# Altium PCB PCB.PcbDoc
Units mm, origin at the board's own origin, x right, y up, seen from the top; angles counter-clockwise.
Board outline 30 x 50 mm, 2 copper layers (Top Layer, Bottom Layer); 30 components, 21 nets, 99 pads, 31 vias.
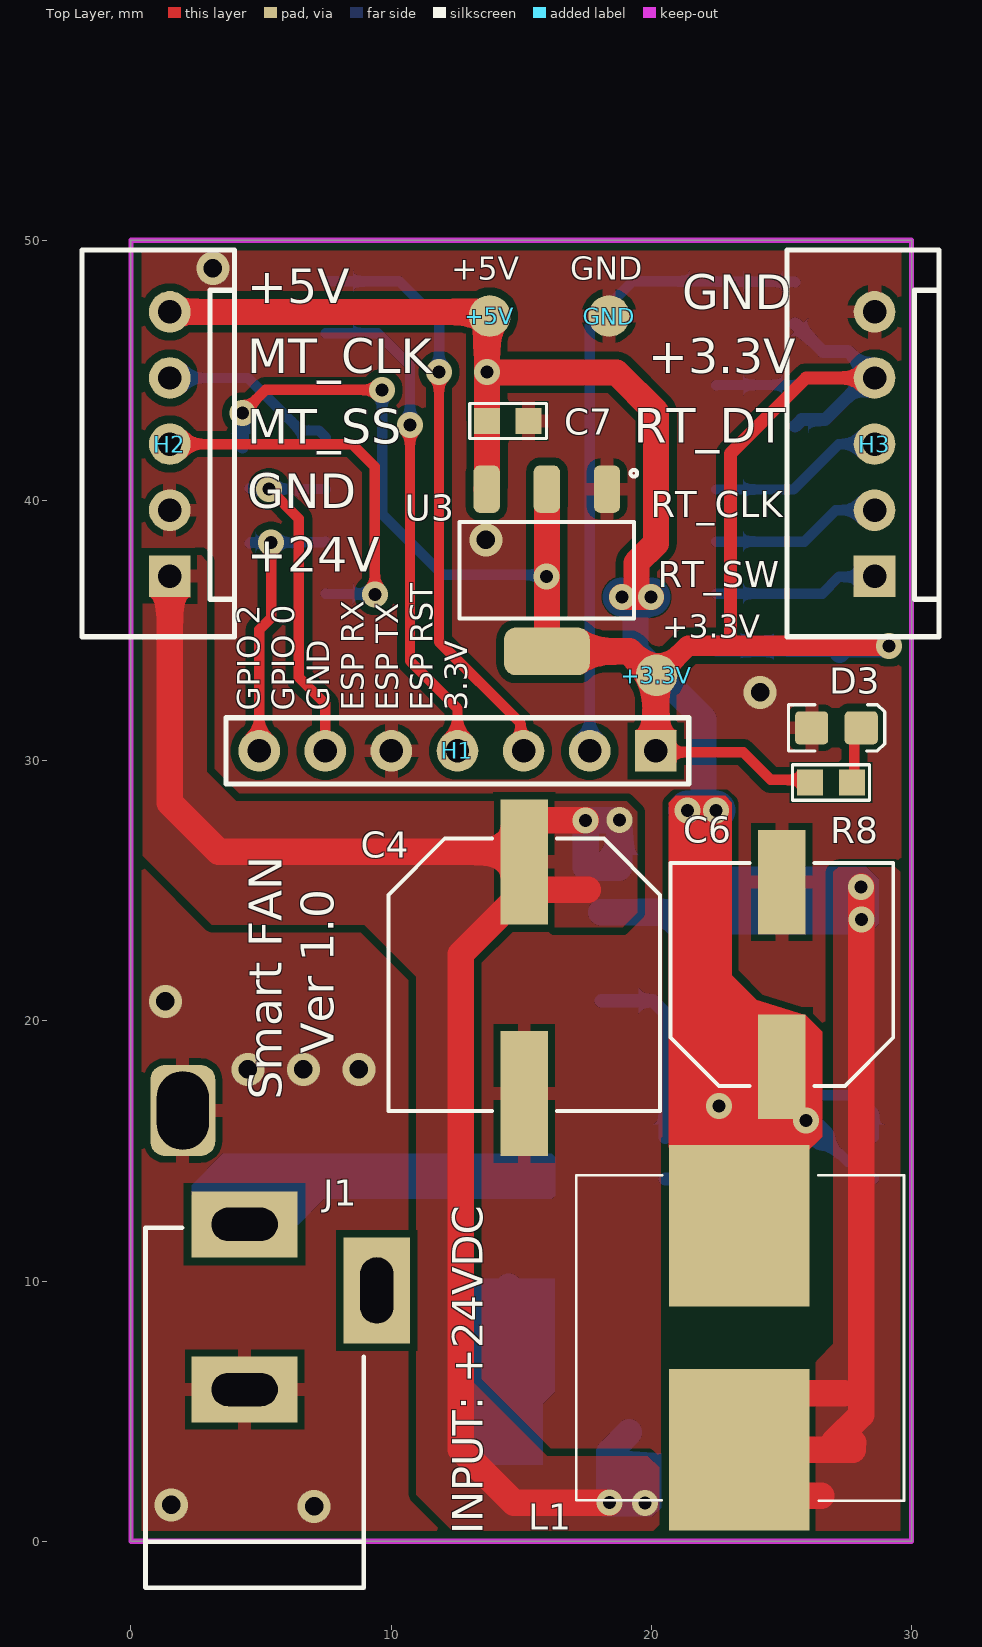
[diagram p0: Top Layer view]
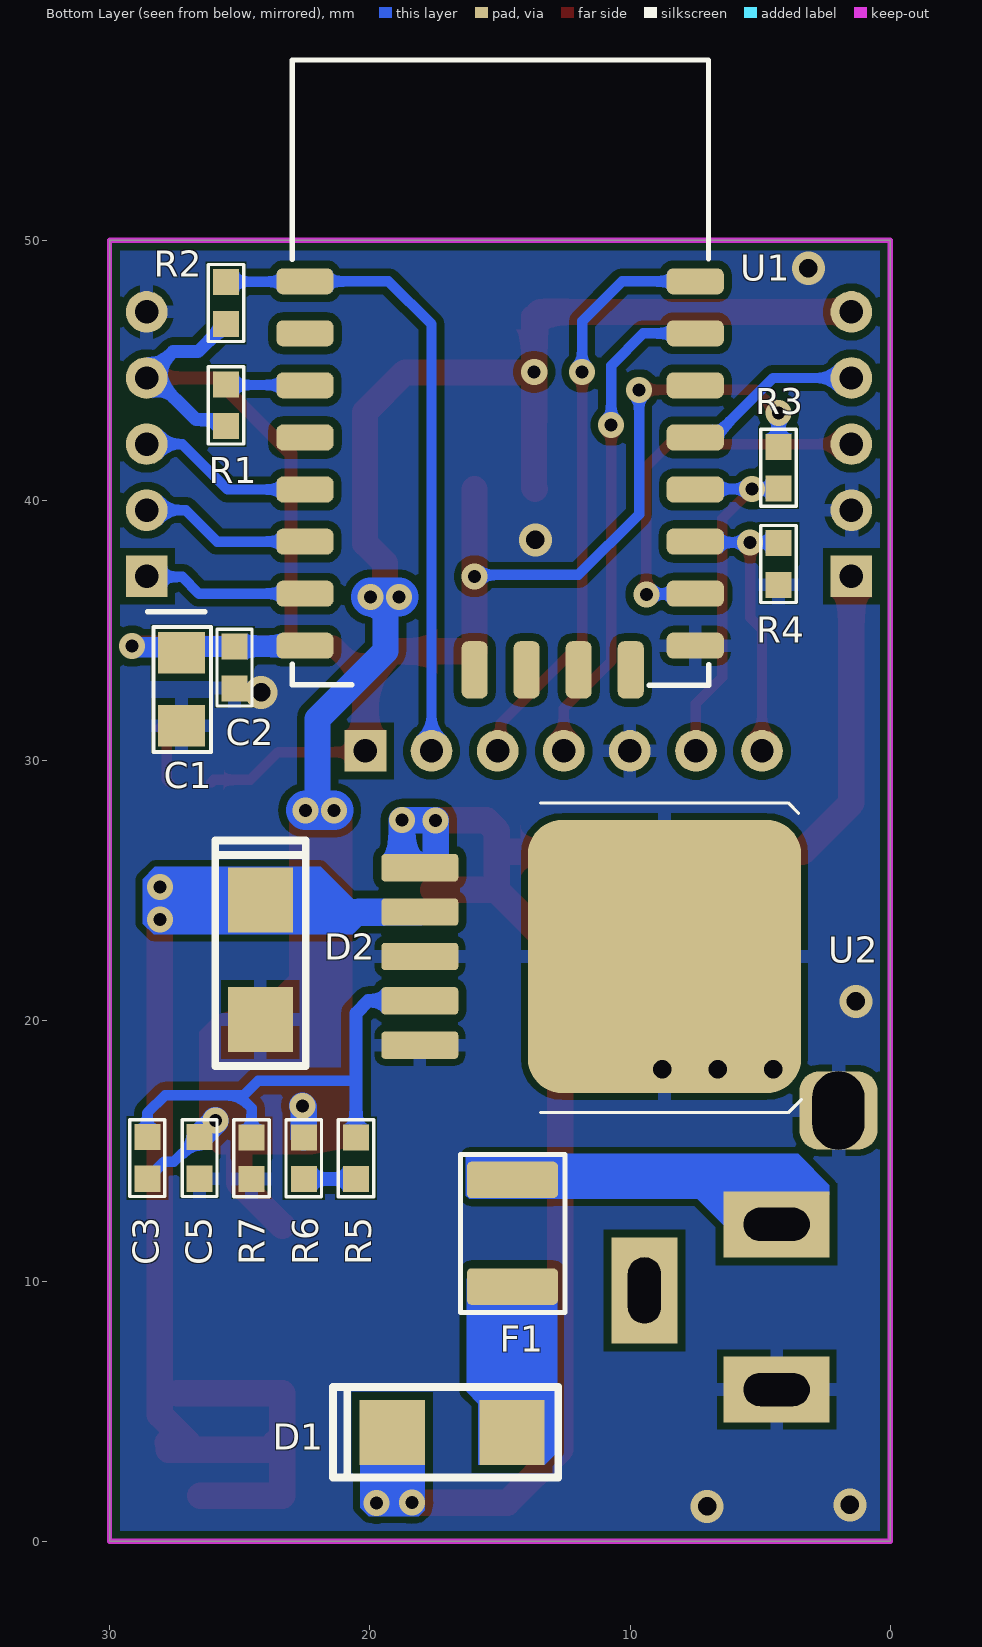
[diagram p1: Bottom Layer view, seen from below]
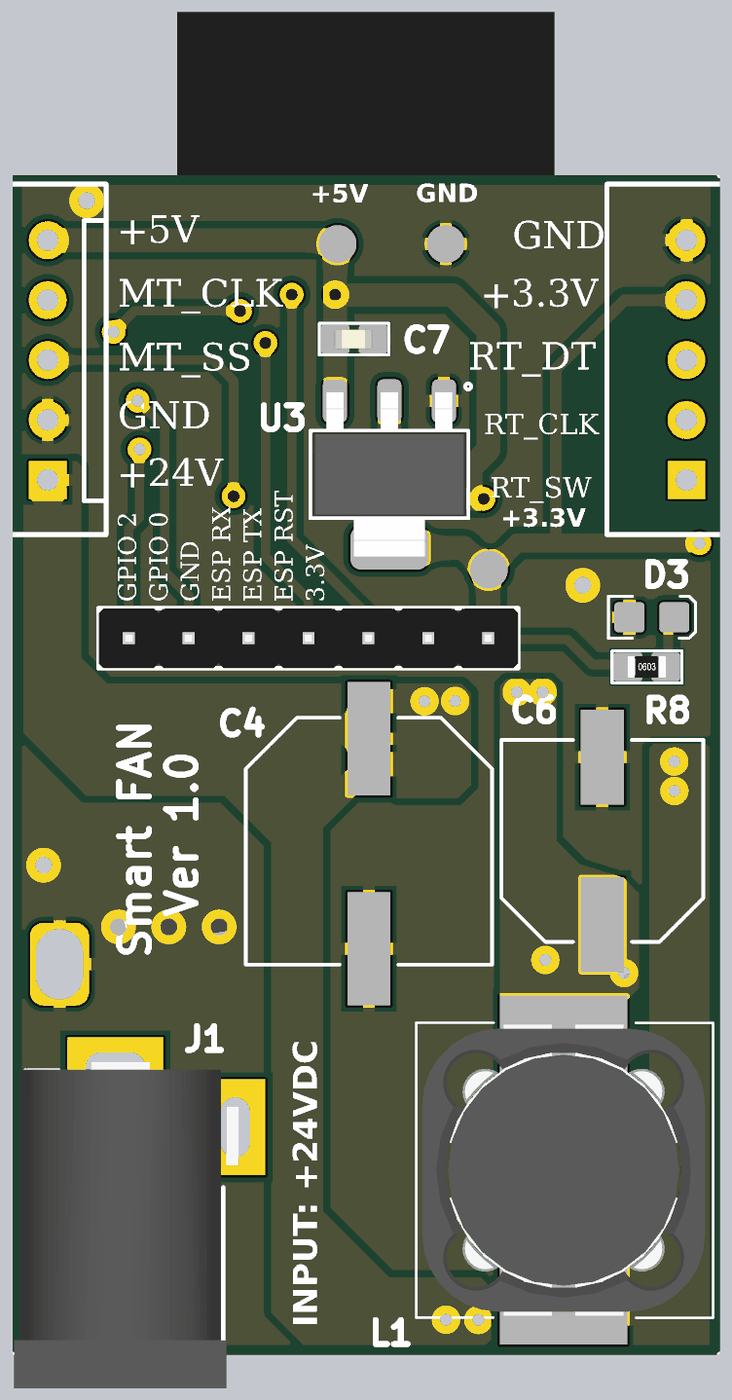
[diagram p2: 3D render of the assembled board from above, using the file's embedded part models]
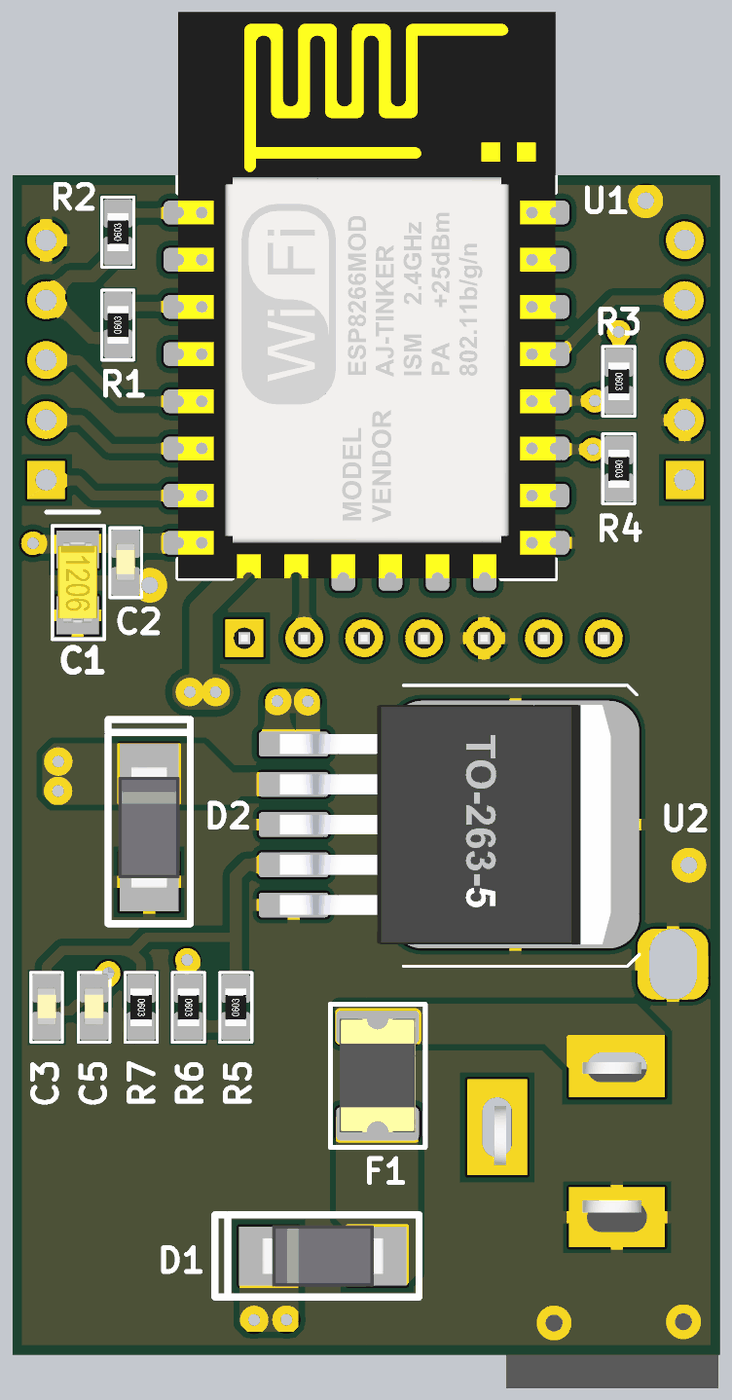
[diagram p3: 3D render of the assembled board from below, using the file's embedded part models]

## Layer stack, top to bottom
Top Solder: solder mask 0.0102, Solder Resist, Dk 3.5
Top Layer: signal copper 0.0356
Dielectric 1: dielectric 0.32, FR-4, Dk 4.8
Bottom Layer: signal copper 0.0356
Bottom Solder: solder mask 0.0102, Solder Resist, Dk 3.5

## Board outline
0,0 0,50 30,50 30,0

## Design rules (kind name [scope] priority, off if disabled: settings)
Clearance [All] p1: gap=0.254 ignorepadtopadclearanceinfootprint=FALSE except(0: Arc-Hole Track-Hole SMDPad-Hole THPad-Hole Via-Hole Fill-Hole Poly-Hole Region-Hole Text-Hole; 0.1: Text-Text; 0.2: Arc-Text Track-Text SMDPad-Text THPad-Text Via-Text Fill-Text Poly-Text Region-Text; 0.3: Arc-Poly Track-Poly SMDPad-Poly THPad-Poly Via-Poly Poly-Poly)
PolygonConnect PolygonConnect_PAD [IsVia] p1: connectstyle=Direct reliefconductorwidth=0.254 reliefentries=4 polygonreliefangle="90 Angle" airgapwidth=0.254
PolygonConnect [All] p2: connectstyle=Relief reliefconductorwidth=0.508 reliefentries=4 polygonreliefangle="90 Angle" airgapwidth=0.254
RoutingVias [All] p1: holewidth=0.5 width=1 viastyle="Through Hole" minholewidth=0.5 minwidth=1 maxholewidth=0.5 maxwidth=1
SilkToSilkClearance [All] p1: silktosilkclearance=0.15
SilkToSolderMaskClearance [IsPad] p1: minsilkscreentomaskgap=0.1 clearancetoexposedcopper=TRUE
SolderMaskExpansion SolderMaskExpansion_VIA [IsVia] p1: expansion=-44 istentingtop=FALSE
SolderMaskExpansion [All] p2: expansion=0.102 istentingtop=FALSE
Width [All] p1: maxlimit=1.778 minlimit=0.254 preferedwidth=1.016
28 further rules are at their usual default settings.

## Components (designator, comment, footprint, x,y, rotation, side; value= is the part's Value field where it differs from the comment)
+3.3V "Test Point" "TEST POINT" 20.2,33.283 r90 top
+5V "Test Point" "TEST POINT" 13.786,47.085 r180 top
C1 "10uF16V" "CAP TANTALUM TAJA 1206" 27.237,32.744 r270 bottom
C2 "0.1uF" "CAP 0603" 25.2,33.579 r270 bottom
C3 "10pF" "CAP 0603" 28.55,14.732 r270 bottom
C4 "220uF" "CAP ALUMINUM UUD 10X10MM SMD" 15.116,21.661 r270 top
C5 "0.1uF" "CAP 0603" 26.542,14.732 r270 bottom
C6 "100uF" "CAP ALUMINUM UUD 8X10MM SMD" 25.014,21.782 r90 top
C7 "0.1uF" "CAP 0603" 14.485,43.05 r0 top
D1 "SS34" DO-214AC 16.839,4.185 r0 bottom
D2 "SS34" DO-214AC 24.208,22.35 r90 bottom
D3 "LED" "LED 0805-A" 27.111,31.26 r0 top value="LED 3 - 5 ly 2 Colour"
F1 "2.5A 16V" "FUSE 1812" 14.519,11.839 r270 bottom
GND "Test Point" "TEST POINT" 18.374,47.085 r90 top
H1 "Header 2.54mm 1x7PIN" "HEADER 2.54MM 1X7PIN 180" 12.548,30.374 r180 top locked
H2 "XH2.54-5P_A" XH2.54-5P_A 1.494,42.164 r90 top
H3 "XH2.54-5P_A" XH2.54-5P_A 28.575,42.164 r90 top
J1 "Jack DC 5.5x2.1mm" "JACK DC 5.5X2.1MM" 4.952,5.984 r90 top
L1 "68uH" "INDUCTOR CDRH127" 23.368,7.823 r90 top locked
R1 "10k" "RES 0603" 25.527,43.65 r90 bottom
R2 "10k" "RES 0603" 25.527,47.587 r90 bottom
R3 "10k" "RES 0603" 4.293,41.259 r270 bottom
R4 "10k" "RES 0603" 4.293,37.554 r270 bottom
R5 "1.5k" "RES 0603" 20.53,14.722 r90 bottom
R6 "1.5k" "RES 0603" 22.538,14.722 r270 bottom
R7 "1k" "RES 0603" 24.545,14.722 r270 bottom
R8 "120Ω" "RES 0603" 26.9,29.158 r0 top
U1 "ESP8266MOD ESP-12E" "MODULE ESP8266MOD ESP-12E" 14.993,40.953 r180 bottom locked
U2 "LM2596S-ADJ" "TO-263 5PIN" 13.377,22.475 r180 bottom
U3 "LM1117-3.3V" "SOT-223 4PIN" 15.982,37.315 r180 top locked

## Footprints (in the part's own frame and the unit in brackets; to place one, negate y for a bottom-side part, rotate by r counter-clockwise, add the part's x,y. Pads: shape width x height; smd on the part's side, far side on the other; paste and mask are expansions set on the pad)
"CAP 0603" [mm] "Capacitor Ceramic 0603"
  rect 1x1 smd paste+0.102 mask+0.102: 1(0.8,0) 2(-0.8,0)
  silkscreen extent -1.47,-0.67 1.48,0.67, body extent -0.83,-0.41 0.77,0.41, height 0.57
"CAP ALUMINUM UUD 8X10MM SMD" [mil] "Cap Aluminum, UUD 8x10mm, Nichicon SMD"
  rect 158x72 smd: 1(-139.76,0) 2(139.76,0)
  silkscreen extent -168,-168 169,168, body extent -175,-163 175,164, height 394
"CAP ALUMINUM UUD 10X10MM SMD" [mm] "Cap Aluminum, UUD 10x10mm, Nichicon SMD"
  rect 4.8x1.829 smd: 1(-4.45,0) 2(4.45,0)
  silkscreen extent -5.34,-5.22 5.13,5.22, body extent -5.5,-5.14 5.4,5.16, height 10
"CAP TANTALUM TAJA 1206" [mm] "Capacitor Tantalum TAJA 1206, SMD"
  rect 1.6x1.8 smd: 1(-1.4,0) 2(1.4,0)
  silkscreen extent -2.39,-1.07 2.41,1.13, body extent -1.7,-0.84 1.7,0.84, height 1.71
DO-214AC [mm] "JEDEC DO214 variation AC. SMA"
  round 0.508 on Mech15: 0(0,0)
  rect 2.5x2.5 smd: 1(-2.3,0) 2(2.3,0)
  silkscreen extent -4.08,-1.74 4.58,1.74, body extent -2.6,-1.3 2.6,1.3, height 2.42
"FUSE 1812" [mm] "Fuse 1812, SMD"
  round 0.508 on Mech15: 0(0,0)
  rrect25% 1.4x3.5 smd: 1(-2.05,0) 2(2.05,0)
  silkscreen extent -3.02,-2 3.05,2.02, body extent -2.41,-1.61 2.41,1.61, height 1.32
"HEADER 2.54MM 1X7PIN 180" [mm] "Header male, 2.54mm, 1x7PIN, 180 Degrees DIP"
  rect 1.6x1.6 hole 0.9: 1(-7.62,0)
  round 1.6 hole 0.9: 2(-5.08,0) 3(-2.54,0) 4(0,0) 5(2.54,0) 6(5.08,0) 7(7.62,0)
  silkscreen extent -8.89,-1.27 8.89,1.27, body extent -8.89,-1.27 8.89,1.27, height 7.98
"INDUCTOR CDRH127" [mm] "Inductor CDRH127, 12X12X8mm, SMD"
  rect 6.2x5.4 smd: 1(-4.3,0) 2(4.3,0)
  silkscreen extent -6.26,-6.34 6.25,6.25, body extent -6.17,-6 6.17,6, height 7.44
"JACK DC 5.5X2.1MM" [mil]
  rect 100x160 hole 50 slot 100 at 90 deg: 1(244,23) 2(-6,23)
  rect 160x100 hole 50 slot 100 at 0 deg: 3(144,-177)
  silkscreen extent -306,-157 239,173, body extent -291,-182 253,192, height 434
"LED 0805-A" [mil] "LED 0805 Anode"
  round 20 on Mech15: 0(0,0)
  rrect25% 50x50 smd: 1(37.5,0) 2(-37.5,0)
  Top Layer pour cut-out: -15,30 15,30 15,-30 -15,-30
  silkscreen extent -72,-35 73,35, body extent -39,-25 39,25, height 31
"MODULE ESP8266MOD ESP-12E" [mm] "SDIO 2.0-SPI-UART, 802.11b/g/n, 4MB Flash, 3-3.6V 80mA"
  rrect50% 2.2x1 smd: 1(-7.5,7.465) 2(-7.5,5.465) 3(-7.5,3.465) 4(-7.5,1.465) 5(-7.5,-0.535) 6(-7.5,-2.535) 7(-7.5,-4.535) 8(-7.5,-6.535) 15(7.5,-6.535) 16(7.5,-4.535) 17(7.5,-2.535) 18(7.5,-0.535) 19(7.5,1.465) 20(7.5,3.465) 21(7.5,5.465) 22(7.5,7.465)
  rrect50% 1x2.2 smd: 11(-0.98,-7.465) 12(1.02,-7.465) 13(3.02,-7.465) 14(5.02,-7.465)
  silkscreen extent -7.99,-8.06 8.02,15.96, body extent -7.99,-8.04 8.02,15.96, height 2.65
"RES 0603" [mm] "Resistor 0603"
  rect 1x1 smd paste+0.102 mask+0.102: 1(0.8,0) 2(-0.8,0)
  silkscreen extent -1.48,-0.68 1.48,0.68, body extent -0.8,-0.45 0.8,0.45, height 0.5
"SOT-223 4PIN" [mil] "Package Type: SOT-223, Package Drawing: DCY"
  rrect50% 40x72 smd: 1(-91,-122.75) 2(0,-122.75) 3(91,-122.75)
  rrect50% 130x72 smd: 4(0,122.75)
  silkscreen extent -136,-152 132,73, body extent -128,-137 128,137, height 66
"TEST POINT" [mm] "Test Point 1.6mm, SMD"
  round 1.6 smd: 1(0,0)
"TO-263 5PIN" [mm] "D-PAK/TO-263 5PIN"
  round 0.5 on Mech15: 0(1.45,0)
  rrect25% 2.95x1.05 smd: 1(-4.7,3.41) 2(-4.7,1.705) 3(-4.7,0) 4(-4.7,-1.705) 5(-4.7,-3.41)
  rrect25% 10.5x10.5 smd: 3(4.7,0)
  silkscreen extent -0.05,-6 9.95,5.9, body extent -5.28,-5.08 8.74,5.08, height 4.56
XH2.54-5P_A [mm] "Bus, 5PIN 2.54mm, 180 Degrees DIP"
  rect 1.6x1.6 hole 0.9: 1(-5.08,0)
  round 1.6 hole 0.9: 2(-2.54,0) 3(0,0) 4(2.54,0) 5(5.08,0)
  silkscreen extent -7.4,-2.48 7.46,3.37, body extent -7.45,-2.35 7.45,3.4, height 7

## Part data
+3.3V +5V GND: "Test Point 1.6mm, SMD"
C1: library part "Cap Tantalum 1206 10uF16V", "Capacitor Tantalum TAJA106K016RNJ, 10uF 16V 10%, 1206 SMD"
C2 C5 C7: library part "Cap 0603 - 50V - 0.1uF", "[LK00183] / Tụ điện Ceramic 0603 0.1uF, 50V, 10%"
C3: library part "Cap 0603 - 50V - 10pF", "[LK00370] / Tụ điện Ceramic 0603 10pF, 50V, 5%"
C4: library part "Cap Aluminum 50V - 220uF", "[LK00306] / Tụ Aluminum 220uF 50V 20%, 10x10.5mm, SMD (UUD1H221MNL1GS Nichicon)"
C6: library part "Cap Aluminum 50V - 100uF", "[LK00305] / Tụ Aluminum 100uF 50V 20%, 8x10.5mm, SMD (UUD1V101MNL1GS Nichicon)"
D1: library part "Diode Schottky SS34", "[LK00095] / Diode Schottky SS34, Small Signal Schottky Diode, Vrrm=40V, If=3A, SOD-80 SMD"
D2: library part "Diode Schottky SS34", "[LK00087] / Diode Schottky SS34, Small Signal Schottky Diode, Vrrm=40V, If=3A, SOD-80 SMD"
D3: library part "LED 0805 SMD", "LED 0805 SMD Green"
F1: library part "Fuse 1812 2.5A 16V", "[LK00218] / Fuse PTC MF-MSMF250/16X, 2.5A 16V, 1812 SMD"
H1: library part "Header 2.54mm 1x7PIN 180", "Header male 2.54mm, 1x7PIN, 180 Degrees DIP"
H2 H3: "Bus, XH2.54-5PIN 2.54mm, 180 Degrees DIP"
L1: library part "Inductor CDRH127 68uH", "[LK00261] / Inductor CDRH127 68uH, 12X12X8mm, SMD"
R1 R2 R3 R4: library part "Res 0603 - 1% - 10k", "[LK00053] / Resistor 0603, 10k, 1%, 1/10W"
R5 R6: library part "Res 0603 - 1% - 1.5k", "[LK00050] / Resistor 0603, 1.5k, 1%, 1/10W"
R7: library part "Res 0603 - 1% - 1k", "[LK00054] / Resistor 0603, 1k, 1%, 1/10W"
R8: library part "Res 0603 - 5% - 120Ω", "[LK00234] / Resistor 0603 120R, 5%, 1/10W"
U1: library part "Module ESP8266MOD ESP-12E", "Module ESP8266MOD ESP-12E, SDIO 2.0-SPI-UART, 802.11b/g/n, 4MB Flash, 3-3.6V 80mA"
U2: "[LK00299] / IC Power LM2596S-ADJ, In Vmax 40V, Buck ADJ 3A, 1.23-37V, TO263-5 SMD"
U3: library part "Power LM1117-3.3V", "IC LM1117-3.3V, 8mA, Vmax=20V, SOT-223"

## Free pads (board coordinates)
  rrect45% 2.5x3.5 / inner rrect50% 3x3 / far side rrect50% 3x3 hole 2 slot 3 at 90 deg paste+0 mask+0.1: 2(1.993,16.555)

## Via types
v1: diameter 1, hole 0.5, Top Layer to Bottom Layer, 22 vias
v2: diameter 1.27, hole 0.711, Top Layer to Bottom Layer, 9 vias

## Nets (pads, with @x,y where several pads share a name; then routed paths per layer and width w, separated by ;. In a path a pad name is that pad's centre, name@x,y a point inside that pad or via, vN(x,y) a via of type N, cw(c..) or ccw(c..) an arc to the next point about the centre after c; other vN are vias at no path point)
+3.3V_SYS: +3.3V.1 C1.1 C2.2 H1.1 H3.4 R1.2 R2.2 R3.2 R8.2 U1.8 U3.2 U3.4 | length 77.5
  Top Layer w0.4: v1(4.293,43.358) 5.182,44.247 v1(9.652,44.247) ; H1.1 20.218,30.324 23.524,30.324 23.571,30.277 24.587,29.261 25.997,29.261 R8.2
  Top Layer w0.5: 23.033,34.417 23.033,41.796 25.941,44.704 H3.4
  Top Layer w0.8: +3.3V.1@20.168,33.172 21.414,34.417 23.033,34.417 29.112,34.417 v1(29.131,34.398)
  Top Layer w1: U3.4 15.982,37.084 U3.2
  Top Layer w1.016: U3.4 19.143,34.197 20.168,33.172 H1.1
  Bottom Layer w0.4: v1(9.652,44.247) 9.652,39.472 11.989,37.135 15.926,37.135 v1(15.977,37.084)
  Bottom Layer w0.5: R3.2 v1(4.293,43.358) ; R1.2 25.777,43.1 26.673,43.1 28.277,44.704 H3.4 27.559,45.72 26.594,45.72 R2.2
  Bottom Layer w0.8: U1.8 22.513,34.398 25.253,34.398 25.273,34.378 25.281,34.386 C1.1@27.421,34.386 ; C1.1 27.452,34.36 29.093,34.36 v1(29.131,34.398)
+5V_SYS: +5V.1 C3.1 C5.2 C6.1 C7.2 H2.5 L1.2 R6.2 U3.3 | length 71.6
  Top Layer w0.8: H2.5 H2.5@1.6,47.244 ; U3.3@13.657,40.446 U3.3 ; C7.2@13.684,43.051 C7.2 ; v1@13.684,44.937 v1(13.682,44.939) 13.685,44.943 v1@13.685,44.977 ; +5V.1@13.685,46.984 +5V.1 ; v1(22.479,28.092) 22.479,21.807 24.447,19.838 24.5,19.838 25.014,19.324 C6.1
  Top Layer w1: H2.5@1.6,47.244 13.465,47.244 13.682,47.027 +5V.1@13.682,46.98 ; U3.3@13.657,40.446 13.685,40.475 C7.2 ; C7.2@13.682,43.078 v1(13.682,44.939) +5V.1@13.682,46.98 ; +5V.1@13.685,46.984 +5V.1@13.682,46.98 ; v1@13.74,44.922 18.651,44.922 20.177,43.396 20.177,38.349 19.424,37.597 19.424,36.289 ; v1(18.879,36.289) 19.424,36.289 ; v1(19.979,36.28) 19.97,36.289 19.424,36.289
  Top Layer w1.016: v1(22.593,16.732) 24.235,16.732 24.236,16.733 25.014,16.733 25.014,15.672 ; L1.2 25.014,13.769 25.014,15.672 ; C6.1@25.014,17.14 C6.1 ; v1(25.933,16.18) 25.425,15.672 25.014,15.672
  Bottom Layer w0.4: C5.2 27.188,14.886 27.23,14.886 27.538,14.578 27.904,14.578 C3.1
  Bottom Layer w1: v1(19.979,36.28) 19.393,35.694 19.393,34.219 22.009,31.602 22.009,28.562
  Bottom Layer w1.016: R6.2 22.538,16.677 v1(22.593,16.732) ; v1(25.933,16.18) 25.933,16.141 C5.2
  Bottom Layer w1.5: v1(18.879,36.289) 19.97,36.289 v1(19.979,36.28) ; v1(21.381,28.092) v1(22.479,28.092)
+24V_SYS: C4.1 D1.2 H2.1 U2.1 | length 68.6
  Top Layer w1.016: H2.1 1.494,28.376 3.379,26.492 C4.1@15.116,26.492 ; v1(17.472,27.7) 15.522,27.7 15.116,27.294 C4.1@15.116,26.492 ; 17.56,25.032 C4.1@15.116,25.032 ; v1(18.382,1.485) 14.72,1.485 12.675,3.531 12.675,22.565 15.116,25.006 C4.1@15.116,25.032 ; C4.1@15.116,25.032 C4.1@15.116,26.492
  Bottom Layer w1.016: v1(17.472,27.7) 17.472,25.902 17.489,25.885 U2.1 18.754,25.885 18.771,25.902 v1(18.771,27.711) v1@17.483,27.711 ; v1(18.382,1.485) 18.397,1.5 18.397,3.443 D1.2
  other v1: 19.75,1.475
ESP_GPIO_0: H1.6 R3.1 U1.18 | length 13.9
  Top Layer w0.4: v1(5.309,40.439) 6.452,39.296 6.452,33.198 7.468,32.181 H1.6
  Bottom Layer w0.4: R3.1@4.572,40.459 4.593,40.439 v1(5.309,40.439) 7.472,40.439 U1.18
ESP_GPIO_2: H1.7 R4.2 U1.17 | length 11.1
  Top Layer w0.4: H1.7 4.928,35.027 5.385,35.484 v1(5.385,38.379)
  Bottom Layer w0.4: R4.2@4.572,38.354 4.604,38.386 7.461,38.386 U1.17
ESP_RST: H1.2 R2.1 U1.1 | length 25
  Bottom Layer w0.4: H1.2 17.628,46.762 19.284,48.418 U1.1 ; U1.1@22.49,48.415 U1.1 ; R2.1 25.512,48.402 22.509,48.402 U1.1
ESP_RX: H1.4 U1.21 | length 19.3
  Top Layer w0.4: v1(10.725,42.891) 10.725,33.827 12.548,32.003 H1.4
  Bottom Layer w0.4: U1.21 9.487,46.418 10.725,45.181 v1(10.725,42.891)
ESP_TX: H1.3 U1.22 | length 22.8
  Top Layer w0.4: v1@11.843,44.908 11.838,44.902 11.838,34.568 14.97,31.436 14.97,30.492 H1.3
  Bottom Layer w0.4: U1.22 10.301,48.418 11.843,46.876 v1@11.843,44.908
  other v1: 11.843,44.939
GND: C1.2 C2.1 C4.2 C5.1 C6.2 C7.1 D2.1 D3.2 GND.1 H1.5 H2.2 H3.5 J1.2 pad.2 R4.1 R7.1 U1.15 U2.3 U2.5 U3.1
  other v2: 7.036,1.346 1.549,1.397 4.496,18.136 6.629,18.136 8.763,18.136 1.321,20.752 24.18,32.618 13.64,38.481 3.15,48.92
MOTO_CLK: H2.4 U1.19 | length 6.9
  Bottom Layer w0.4: H2.4 4.498,44.704 6.515,42.687 7.224,42.687 U1.19
MOTO_SS: H2.3 U1.16 | length 15
  Top Layer w0.4: H2.3 8.509,42.164 9.374,41.299 v1(9.374,36.39)
  Bottom Layer w0.4: U1.16 7.507,36.404 9.36,36.404 v1(9.374,36.39)
NetC3_2: C3.2 R5.1 R7.2 U2.4 | length 18.7
  Bottom Layer w0.4: 20.53,17.653 20.571,17.694 24.295,17.694 24.847,17.142 25.041,17.142 ; R7.2 24.545,16.646 25.041,17.142 ; C3.2 28.55,16.459 27.867,17.142 25.041,17.142
  Bottom Layer w0.508: U2.4 20.059,20.77 20.53,20.299 20.53,17.653 R5.1
NetD1_1: D1.1 F1.2 | length 5.6
  Bottom Layer w1.016: F1.2 14.539,9.769 D1.1
NetD2_2: D2.2 L1.1 U2.2 | length 48.3
  Top Layer w1.016: L1.1@23.641,3.796 L1.1 ; 26.52,1.752 23.368,1.752 L1.1 ; 26.997,3.796 28.065,4.864 v1(28.065,23.898) 28.059,23.904 v1(28.059,25.145) ; 27.401,5.693 23.368,5.693 L1.1 ; 27.762,3.785 27.737,3.785 27.737,3.523 L1.1
  Bottom Layer w1.016: U2.2 23.738,24.18 24.28,24.722 27.636,24.722 v1(28.059,25.145)
NetD3_1: D3.1 R8.1 | length 2.3
  Top Layer w0.4: R8.1 27.801,29.26 27.801,30.998 D3.1
NetF1_1: F1.1 J1.1 | length 10.9
  Bottom Layer w1.016: J1.1 5.13,12.181 6.837,13.889 F1.1
NetR1_1: R1.1 U1.3 | length 3
  Bottom Layer w0.4: U1.3 22.509,44.434 25.511,44.434 R1.1
NetR5_2: R5.2 R6.1 | length 2
  Bottom Layer w0.508: R5.2 R6.1
ROTATY_CLK: H3.2 U1.6 | length 6.6
  Bottom Layer w0.4: U1.6 25.87,38.418 27.076,39.624 H3.2
ROTATY_DT: H3.3 U1.5 | length 6.8
  Bottom Layer w0.4: U1.5 25.457,40.418 27.203,42.164 H3.3
ROTATY_SW: H3.1 U1.7 | length 6.4
  Bottom Layer w0.4: U1.7 26.565,36.418 27.209,37.061 28.552,37.061 H3.1
pads on no net: D1.0 D2.0 D3.0 F1.0 J1.3 U1.2 U1.4 U1.11 U1.12 U1.13 U1.14 U1.20 U2.0

## Polygon pours and split planes (outlines as drawn)
GND on Top Layer "GND_L01_P002" (solid, remove dead copper, pour order 2): -0.004,0.004 30.005,0.004 30.005,50.002 -0.001,50.002 -0.001,0.003
NetD2_2 on Top Layer "NETD2_2_L01_P001" (solid, pour order 1): 27.176,25.908 26.995,25.727 26.995,7.589 24.681,5.276 24.681,1.809 26.035,0.407 29.566,0.407 29.566,25.73 29.362,25.908 28.467,25.907 27.184,25.907
+24V_SYS on Top Layer "+24V_SYS_L01_P000" (solid, remove dead copper, pour order 0): 20.295,2.337 20.295,2.261 20.295,0.635 19.888,0.229 12.522,0.229 10.969,1.782 10.969,21.696 8.966,23.698 3.099,23.698 0.457,26.34 0.457,37.897 2.692,37.897 2.921,37.668 2.921,29.566 4.039,28.448 19.05,28.448 19.456,28.042 19.456,24.155 18.898,23.597 14.173,23.597 13.157,22.581 13.157,6.121 16.002,3.277 19.863,3.277 20.295,2.845 20.295,2.399
GND on Bottom Layer "GND_L02_P003" (solid, pour order 3): -0.002,-0.002 30.001,0 30.001,50.002 -0.002,50.002 -0.002,0.007

## Keep-outs
Keep-Out Layer:
  the board outline again, w0.2

## Other copper
Top Layer:
  pour cut-out: 20.368,8.723 20.368,6.807 20.65,6.807 20.65,8.723
  pour cut-out: 12.693,29.274 14.944,29.274 14.944,29.489 12.693,29.489
  region net +5V_SYS: 20.668,15.139 20.668,28.385 20.932,28.649 22.829,28.649 23.088,28.39 23.088,23.053 23.088,21.104 25.924,20.217 26.561,19.58 26.561,15.553 25.879,14.87 22.197,14.87
Bottom Layer:
  region net NetD2_2: 19.377,24.668 20.642,24.668 21.888,25.915 28.255,25.915 28.729,25.441 28.729,23.738 28.311,23.32 20.662,23.32 20.323,23.659 19.408,23.659 19.135,23.932
  region net +24V_SYS: 17.882,3.556 17.882,1.194 18.11,0.965 20.041,0.965 20.371,1.295 20.371,3.378
  region net NetD1_1: 12.802,3.429 13.284,2.946 15.824,2.946 15.824,5.283 16.281,5.74 16.281,10.084 13.183,10.084 12.802,9.703
  region net NetF1_1: 2.337,13.31 2.337,13.691 3.531,14.884 16.18,14.884 16.307,14.757 16.307,13.284 16.18,13.157 12.598,13.157 7.417,13.157 6.401,12.141

## Silkscreen, mask and mechanical layers (free items; w line width, h text height)
Top Overlay:
  text "GND" at 16.877,48.181 h1.52
  text "+5V" at 12.311,48.164 h1.52
  text "+5V" at 4.463,47.143 h2.29
  text "GND" at 21.194,46.896 h2.29
  text "+3.3V" at 19.876,44.439 h2.29
  text "MT_CLK" at 4.463,44.435 h2.29
  text "RT_DT" at 19.323,41.766 h2.29
  text "MT_SS" at 4.463,41.726 h2.29
  text "GND" at 4.463,39.264 h2.29
  text "RT_CLK" at 19.984,39.027 h1.7
  text "+24V" at 4.463,36.825 h2.29
  text "RT_SW" at 20.237,36.338 h1.7
  text "+3.3V" at 20.41,34.419 h1.52
  text "GPIO 2" at 5.239,31.914 h1.5 r90
  text "GPIO 0" at 6.571,31.914 h1.5 r90
  text "GND" at 7.9,31.914 h1.5 r90
  text "ESP RX" at 9.227,31.914 h1.5 r90
  text "ESP TX" at 10.553,31.914 h1.5 r90
  text "ESP RST" at 11.879,31.914 h1.5 r90
  text "3.3V" at 13.212,31.914 h1.5 r90
  text "Ver 1.0" at 7.786,18.729 h1.27 r90
  text "Smart FAN" at 5.798,16.969 h1.27 r90
  text "INPUT: +24VDC" at 13.894,0.27 h2 r90
Bottom Overlay:
  lines w0.2: 26.338,35.718 28.548,35.718

## Dimensions
30,0 to 30,50 on Top Overlay
0,0 to 30,0 on Top Overlay